# Altium PCB AP_2.4G_5.0G.PcbDoc
Units mil, origin at the board's own origin, x right, y up, seen from the top; angles counter-clockwise.
Board outline 1037.58 x 1105.48 mil, 2 copper layers (Top Layer, Bottom Layer); 14 components, 9 nets, 48 pads, 9 vias.
Unrouted connection lines stored in the file: 5.
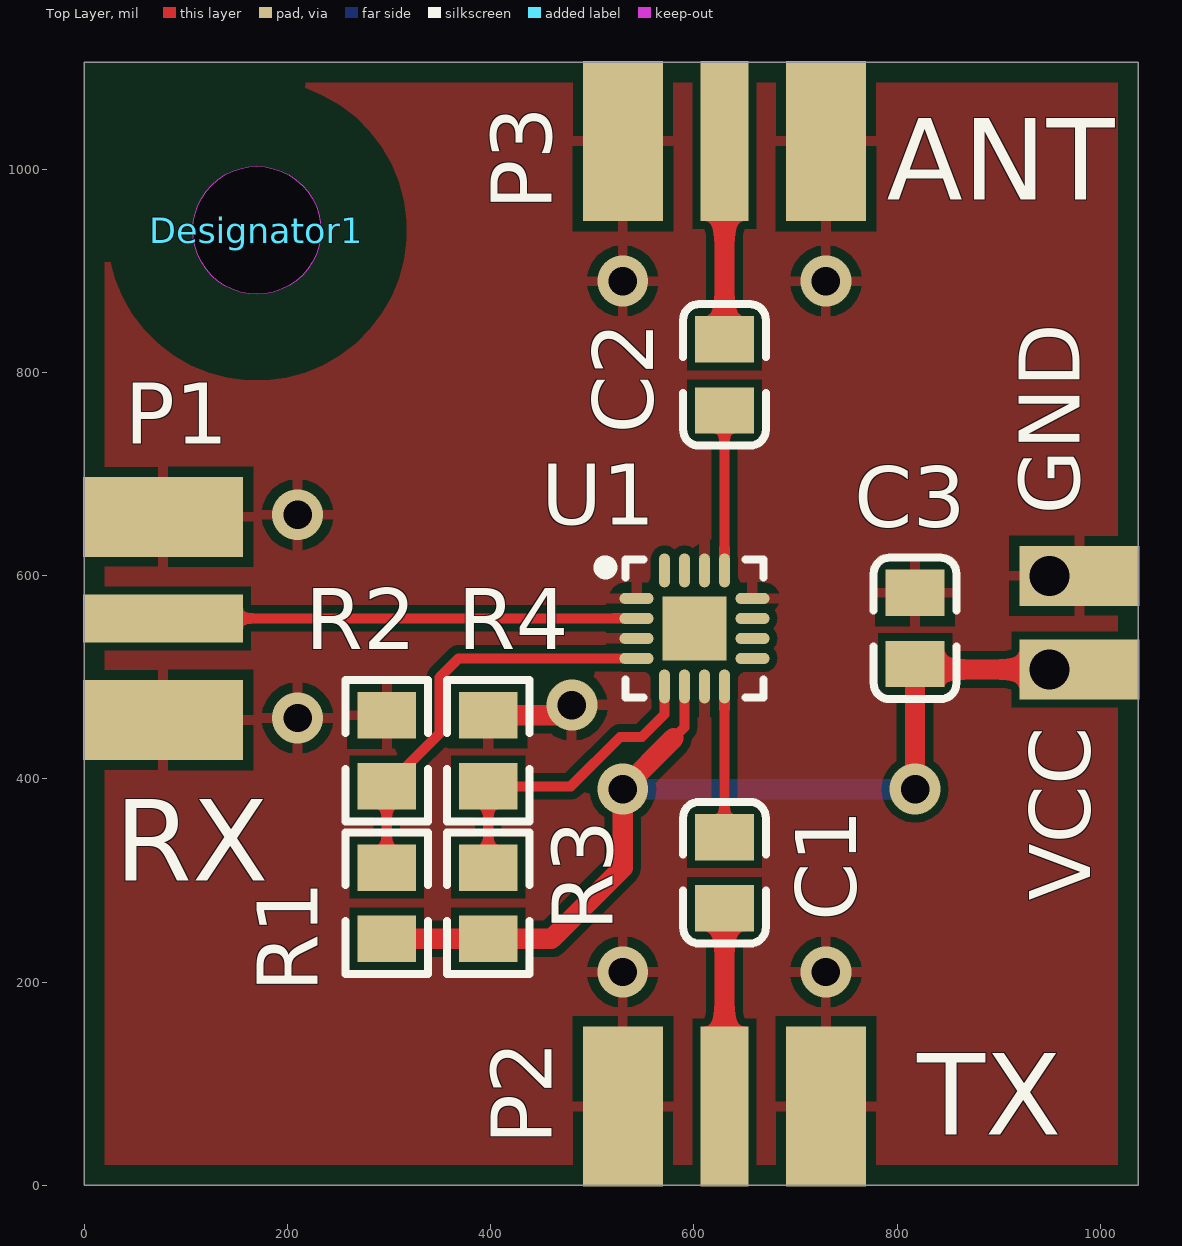
[diagram p0: Top Layer view]
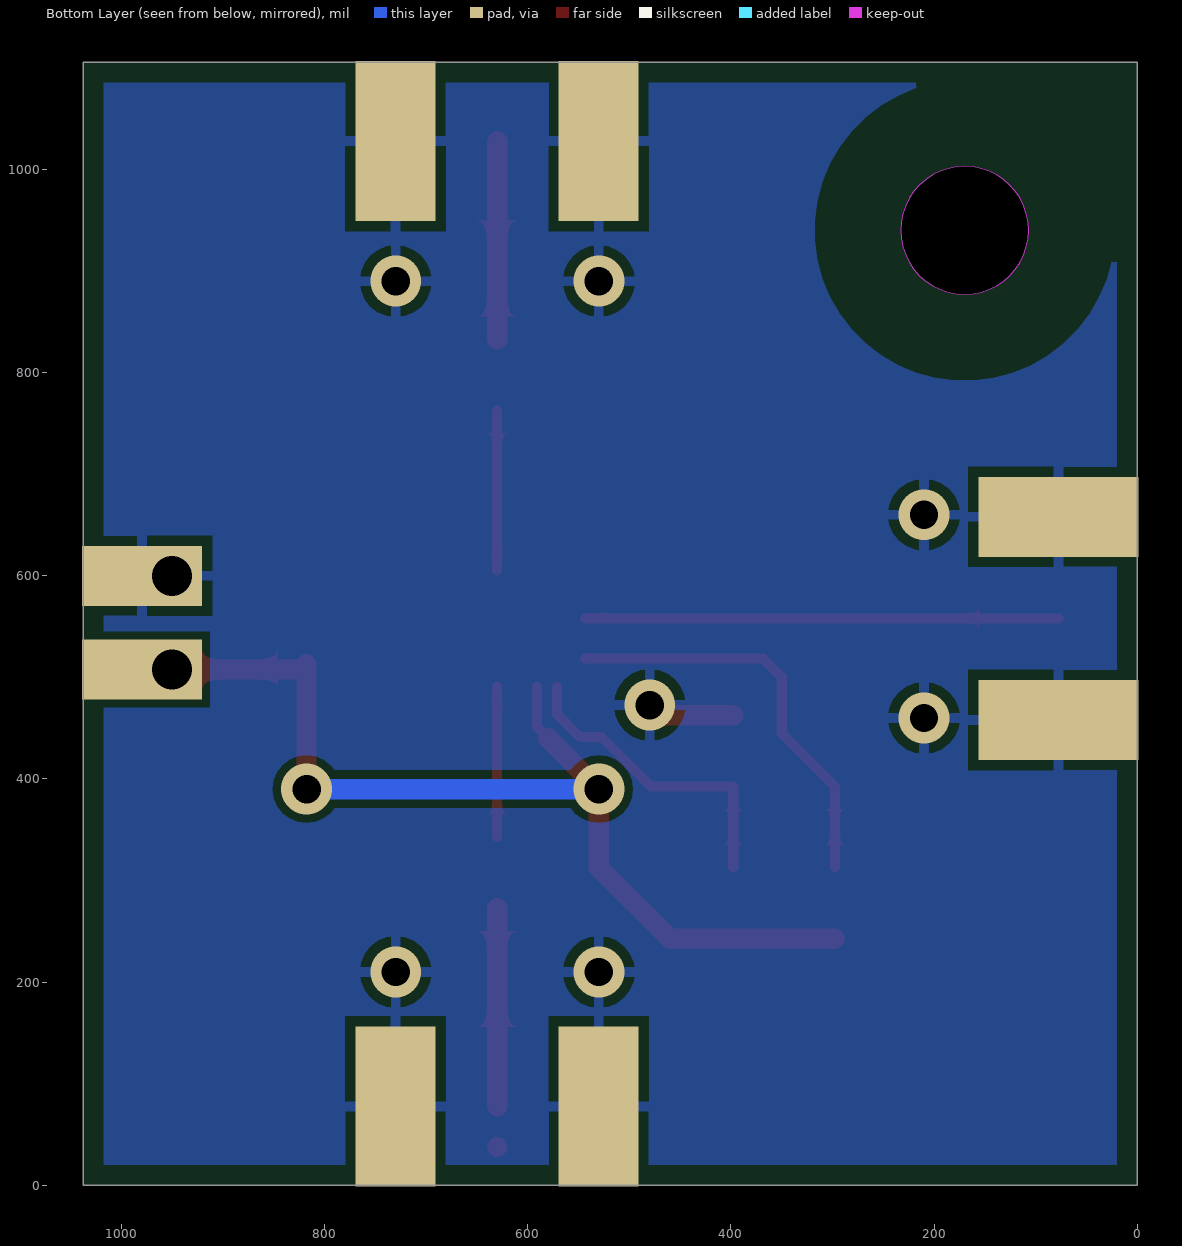
[diagram p1: Bottom Layer view, seen from below]
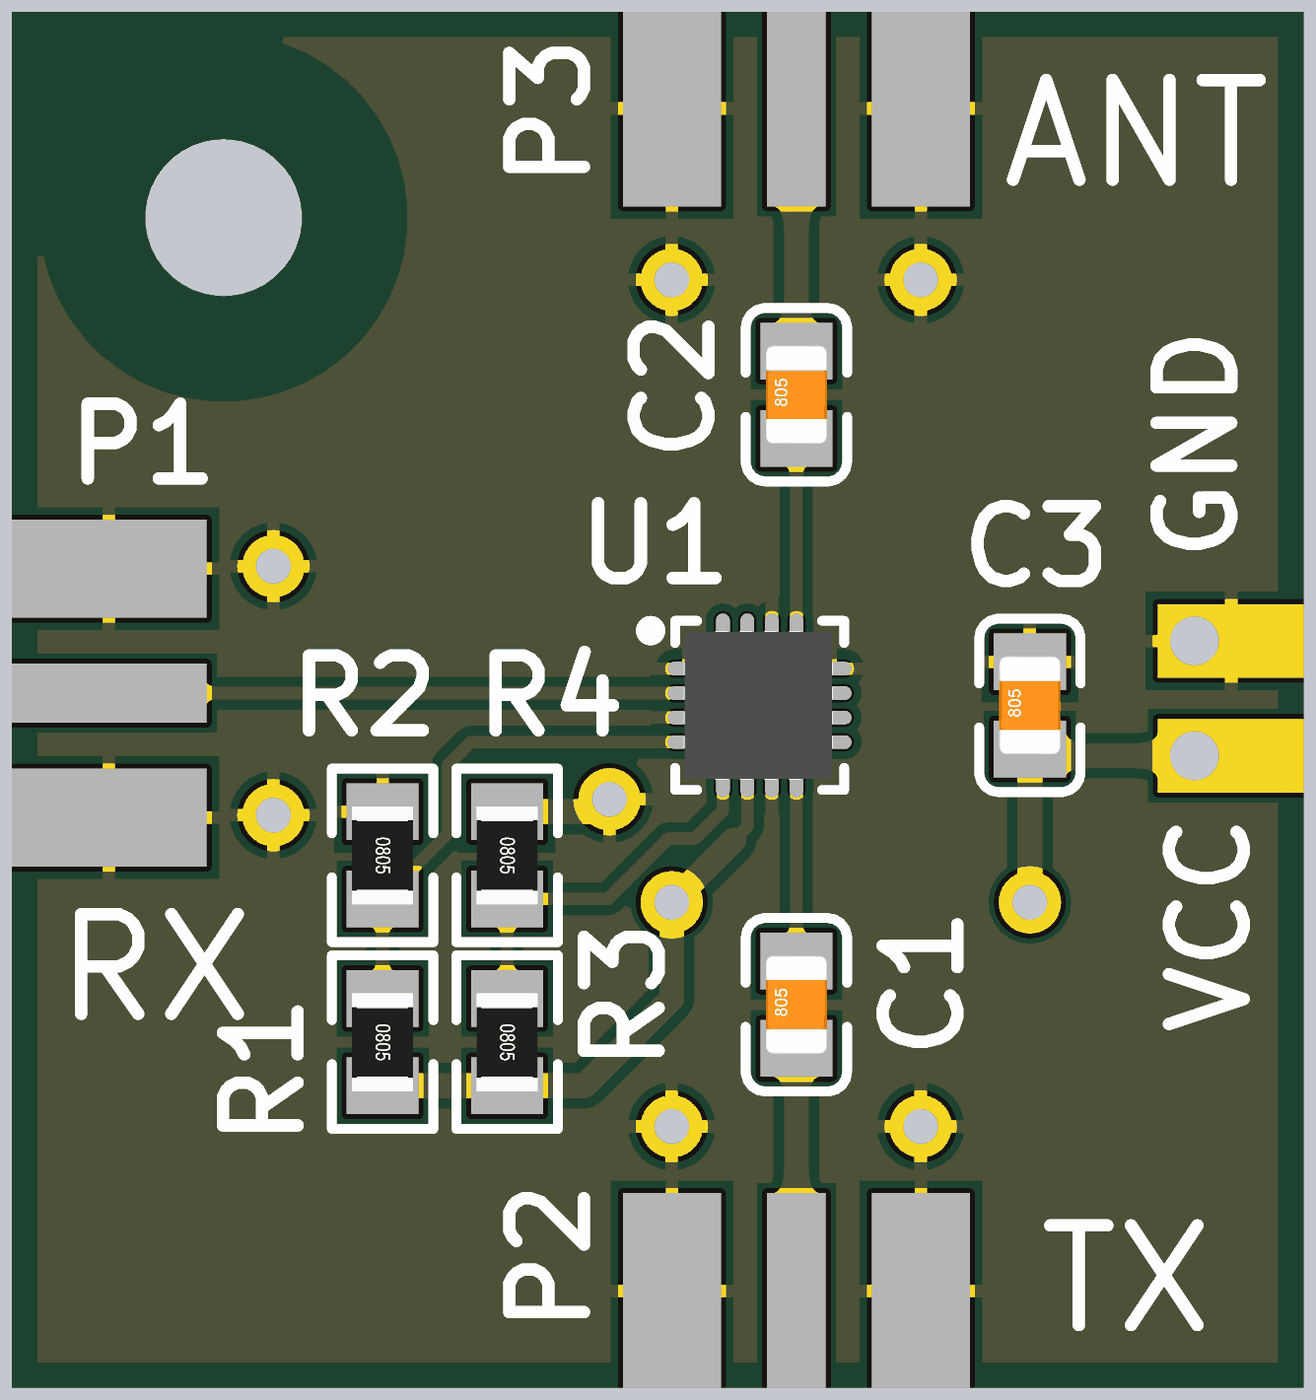
[diagram p2: 3D render of the assembled board from above, using the file's embedded part models]

## Layer stack, top to bottom
Top Solder: solder mask 0.4, Solder Resist, Dk 3.5
Top Layer: signal copper 1.4
Dielectric 1: dielectric 12.6, FR-4, Dk 4.8
Bottom Layer: signal copper 1.4
Bottom Solder: solder mask 0.4, Solder Resist, Dk 3.5

## Board outline
0,0 0,1105.48 1037.58,1105.48 1037.58,0

## Design rules (kind name [scope] priority, off if disabled: settings)
BoardOutlineClearance [All] p1: gap=20 ignorepadtopadclearanceinfootprint=FALSE except(0: SMDPad-OutlineEdge THPad-OutlineEdge)
Clearance [All] p1: gap=8 ignorepadtopadclearanceinfootprint=TRUE
MinimumSolderMaskSliver MinimumSolderMaskSliver_U [HasFootprint('QFN-16_3x3x05P')] p1: minsoldermaskwidth=4
MinimumSolderMaskSliver [All] p2: minsoldermaskwidth=10
PolygonConnect [All] p1: connectstyle=Relief reliefconductorwidth=10 reliefentries=4 polygonreliefangle="90 Angle" airgapwidth=10
RoutingVias [All] p1: holewidth=28 width=50 viastyle="Through Hole" minholewidth=28 minwidth=50 maxholewidth=28 maxwidth=50
SilkToSolderMaskClearance SilkToSolderMaskClearance_R0805 [HasFootprint('0805_R') Or HasFootprint('0805_C')] p1: minsilkscreentomaskgap=3 clearancetoexposedcopper=TRUE
SilkToSolderMaskClearance [IsPad] p2: minsilkscreentomaskgap=10 clearancetoexposedcopper=TRUE
SolderMaskExpansion [All] p1: expansion=4
Width [All] p1: maxlimit=100 minlimit=10 preferedwidth=10
28 further rules are at their usual default settings.

## Classes and differential pairs
component class AP_2.4G_5.0G: C1 C2 C3 GND P1 P2 R1 R2 R3 R4 U1 VCC

## Components (designator, comment, footprint, x,y, rotation, side; value= is the part's Value field where it differs from the comment)
C1 "6pF 50V" 0805_C 630.18,307.74 r90 top (schematic designator C3)
C2 "6pF 50V" 0805_C 630.18,797.74 r90 top (schematic designator C1)
C3 "1uF (105) 50V" 0805_C 817.74,548.21 r90 top (schematic designator C2)
Designator1 "Comment" MH-3.0-NP 170,940 r0 top
GND "SMDHDRX1" SMDHDRX1#1 997.74,587.74 r0 top
P1 "SMA" SMA-KE 77.74,558.05 r90 top (schematic designator P3)
P2 "SMA" SMA-KE 630.18,77.74 r180 top (schematic designator P5)
P3 "SMA" SMA-KE 630.18,1027.74 r180 top (schematic designator P4)
R1 "100KΩ" 0805_R 297.74,277.74 r270 top (schematic designator R2)
R2 "1KΩ" 0805_R 297.74,427.74 r270 top (schematic designator R4)
R3 "100KΩ" 0805_R 397.74,277.74 r270 top (schematic designator R1)
R4 "1KΩ" 0805_R 397.74,427.74 r270 top (schematic designator R3)
U1 "AP" QFN-16_3x3x05P 600.65,548.21 r270 top
VCC "SMDHDRX1" SMDHDRX1#2 997.74,507.74 r0 top

## Footprints (in the part's own frame and the unit in brackets; to place one, negate y for a bottom-side part, rotate by r counter-clockwise, add the part's x,y. Pads: shape width x height; smd on the part's side, far side on the other; paste and mask are expansions set on the pad)
0805_C [mm]
  rect 1.16x1.47 smd: 1(-0.89,0) 2(0.89,0)
  silkscreen extent -1.77,-1.04 1.77,1.04, body extent -1,-0.62 1,0.63, height 0.77
0805_R [mm]
  rect 1.16x1.47 smd: 1(-0.89,0) 2(0.89,0)
  silkscreen extent -1.77,-1.04 1.77,1.03, body extent -1,-0.62 1,0.63, height 0.49
MH-3.0-NP [mil] "安装孔-非金属"
  Top Layer pour cut-out: 0,-147.64 -56.5,-136.4 -104.4,-104.4 -136.4,-56.5 -147.64,0 -147.64,0 -136.4,56.5 -104.4,104.4 -56.5,136.4 0,147.64 0,147.64 56.5,136.4 104.4,104.4 136.4,56.5 147.64,0 147.64,0 136.4,-56.5 104.4,-104.4 56.5,-136.4 0,-147.64
  Bottom Layer pour cut-out: 0,-147.64 -56.5,-136.4 -104.4,-104.4 -136.4,-56.5 -147.64,0 -147.64,0 -136.4,56.5 -104.4,104.4 -56.5,136.4 0,147.64 0,147.64 56.5,136.4 104.4,104.4 136.4,56.5 147.64,0 147.64,0 136.4,-56.5 104.4,-104.4 56.5,-136.4 0,-147.64
  Keep-Out Layer board cut-out: 0,-62.99 -24.11,-58.2 -44.54,-44.54 -58.2,-24.11 -62.99,0 -62.99,0 -58.2,24.11 -44.54,44.54 -24.11,58.2 0,62.99 0,62.99 24.11,58.2 44.54,44.54 58.2,24.11 62.99,0 62.99,0 58.2,-24.11 44.54,-44.54 24.11,-58.2 0,-62.99
QFN-16_3x3x05P [mm] "QFN, 16-Leads, Body 3.00x3.00mm, Pitch 0.50mm, Thermal Pad 1.70x1.70mm, IPC Medium Density"
  rect 1.6x1.6 smd mask+0.051: 0(0,0)
  oval 0.28x0.85 smd mask+0.051: 1(-0.75,-1.45) 2(-0.25,-1.45) 3(0.25,-1.45) 4(0.75,-1.45) 9(0.75,1.45) 10(0.25,1.45) 11(-0.25,1.45) 12(-0.75,1.45)
  oval 0.85x0.28 smd mask+0.051: 5(1.45,-0.75) 6(1.45,-0.25) 7(1.45,0.25) 8(1.45,0.75) 13(-1.45,0.75) 14(-1.45,0.25) 15(-1.45,-0.25) 16(-1.45,-0.75)
  silkscreen extent -1.73,-2.37 1.73,1.73, body extent -1.52,-1.55 1.52,1.49, height 0.9
SMA-KE [mm] "SMA 扁脚"
  rect 1.2x4 smd: 1(0,0)
  rect 2x4 smd: 2(-2.54,0) 2(2.54,0)
  rect 2x4 smd far side: 2(-2.54,0) 2(2.54,0)
SMDHDRX1#1 [mm] "SMD and Hole"
  rect 3x1.5 hole 1 copper offset 0.75,0: 1(-1.213,0.311)
SMDHDRX1#2 [mm] "SMD and Hole"
  rect 3x1.5 hole 1 copper offset 0.75,0: 1(-1.213,0)

## Part data
C1 C2: library part "0805 6pF (6R0) 0.25pF 50V", "贴片电容", Package=0805, SuppliersPartNumber=C67560, ComponentLink1Description=供应商, ComponentLink1URL=http://www.szlcsc.com/product/details_68656.html, Supplier=LC
C3: library part "0805 1uF (105) 10% 50V", "贴片电容", Package=0805, SuppliersPartNumber=C28323, ComponentLink1Description=供应商, ComponentLink1URL=http://www.szlcsc.com/product/details_29074.html, Supplier=LC
GND VCC: "SMA and Hole"
R1 R2 R3 R4: library part "0805 1KΩ (1001) 1%", "贴片电阻", Package=0805, SuppliersPartNumber=C17513, ComponentLink1Description=供应商, ComponentLink1URL=http://www.szlcsc.com/product/details_18201.html, Supplier=LC
U1: library part LS5601, "AP_2.4G_5.0G"

## Via types
v1: diameter 50, hole 28, Top Layer to Bottom Layer, 9 vias

## Nets (pads, with @x,y where several pads share a name; then routed paths per layer and width w, separated by ;. In a path a pad name is that pad's centre, name@x,y a point inside that pad or via, vN(x,y) a via of type N, cw(c..) or ccw(c..) an arc to the next point about the centre after c; other vN are vias at no path point)
GND: C3.2 GND.1 P1.2 P2.2 P3.2 R2.1 R4.1 U1.1 U1.3 U1.7 U1.12 U1.14 | length 89.5
  Top Layer w20: R4.1 v1@487.22,462.78
  other v1: 530,210 730,210 210,460 480,472.78 210,660 530,890 730,890
NetC1_1: C2.1 U1.13 | length 157.4
  Top Layer w10: U1.13 C2.1
NetC1_2: C2.2 P3.1 | length 195
  Top Layer w20: C2.2 P3.1
NetC3_1: C1.1 P2.1 | length 195
  Top Layer w20: P2.1 C1.1
NetC3_2: C1.2 U1.8 | length 148.3
  Top Layer w10: C1.2 U1.8
NetP3_1: P1.1 U1.2 | length 465.8
  Top Layer w10: P1.1 U1.2
NetR1_1: R3.1 R4.2 U1.5 | length 310.2
  Top Layer w10: R3.1 R4.2 478.96,392.7 527.52,441.26 548.74,441.26 571.13,463.65 U1.5
NetR2_1: R1.1 R2.2 U1.4 | length 411.1
  Top Layer w10: R1.1 R2.2 297.82,392.7 350,444.88 350,500 368.68,518.68 U1.4 U1.4@542.94,518.05
VCC: C3.1 R1.2 R3.2 U1.6 VCC.1 | length 1010.3
  Top Layer w10: 580,440 590.81,450.81 U1.6
  Top Layer w20: R1.2 R3.2 460,242.7 530,312.7 v1(530,390) 580,440 ; v1(817.74,390) C3.1 823.17,507.74 VCC.1
  Bottom Layer w20: v1(530,390) v1(817.74,390)
pads on no net: U1.0 U1.9 U1.10 U1.11 U1.15 U1.16

## Polygon pours and split planes (outlines as drawn)
GND on Top Layer "Top Layer-GND" (solid, remove dead copper, pour order 0): 0,0 0,1105.48 1037.58,1105.48 1037.58,0
GND on Bottom Layer "Bottom Layer-GND" (solid, remove dead copper, pour order 1): 0,0 0,1105.48 1037.58,1105.48 1037.58,0

## Silkscreen, mask and mechanical layers (free items; w line width, h text height)
Top Overlay:
  text "ANT" at 790,970 h80
  text "RX" at 30,300 h80
  text "TX" at 820,50 h80
Mechanical 1:
  the board outline again, w10